# Altium PCB ECE453.PcbDoc
Units mil, origin at the board's own origin, x right, y up, seen from the top; angles counter-clockwise.
Board outline 3937.01 x 3937.01 mil, 2 copper layers (Top Layer, Bottom Layer); 50 components, 19 nets, 102 pads, 57 vias.
Unrouted connection lines stored in the file: 41.
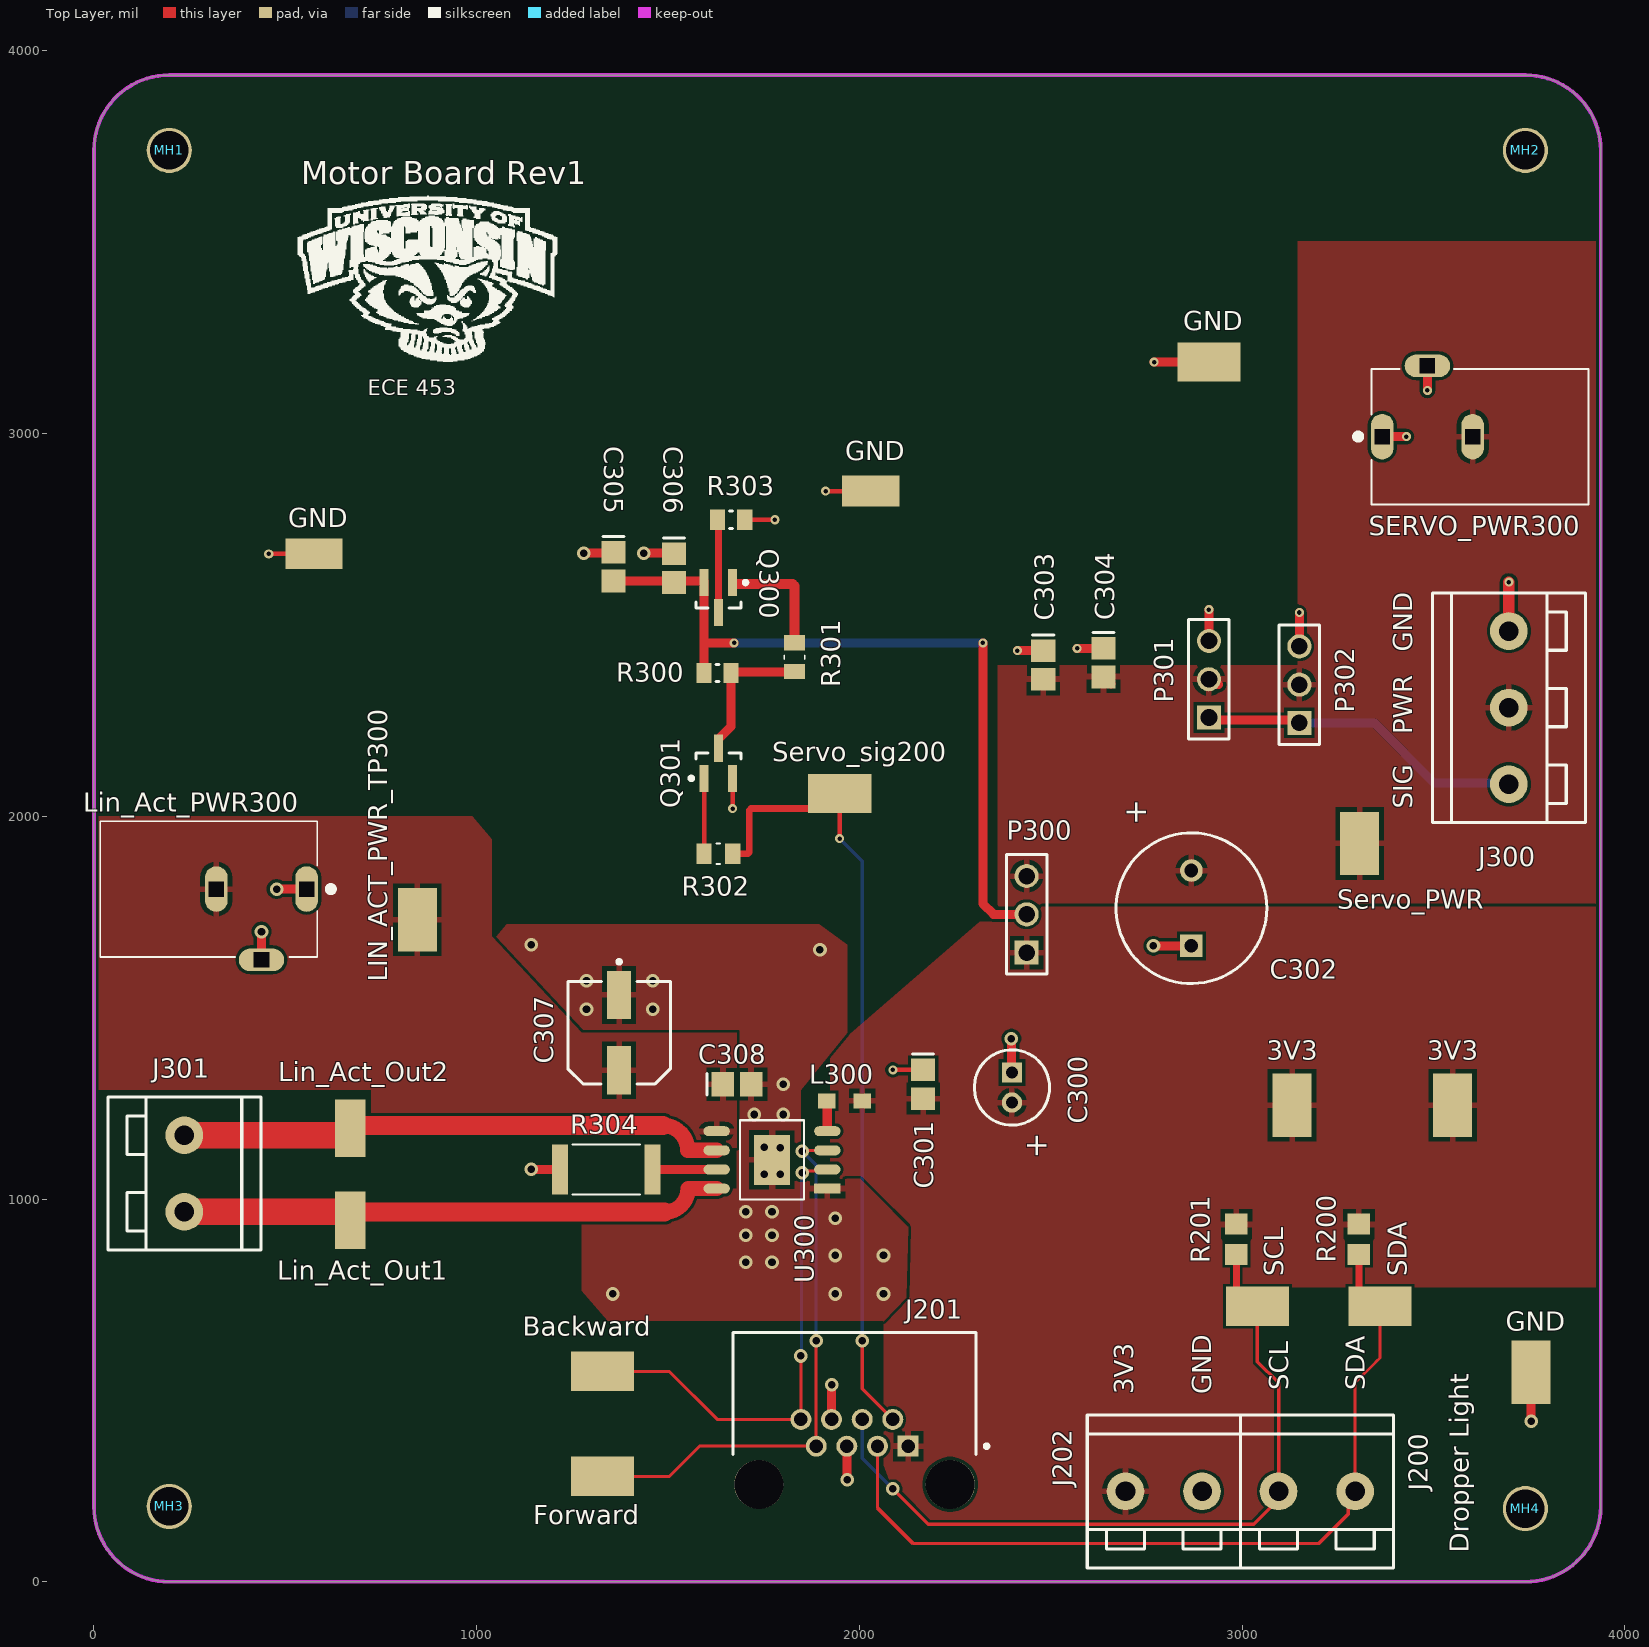
[diagram p0: Top Layer view]
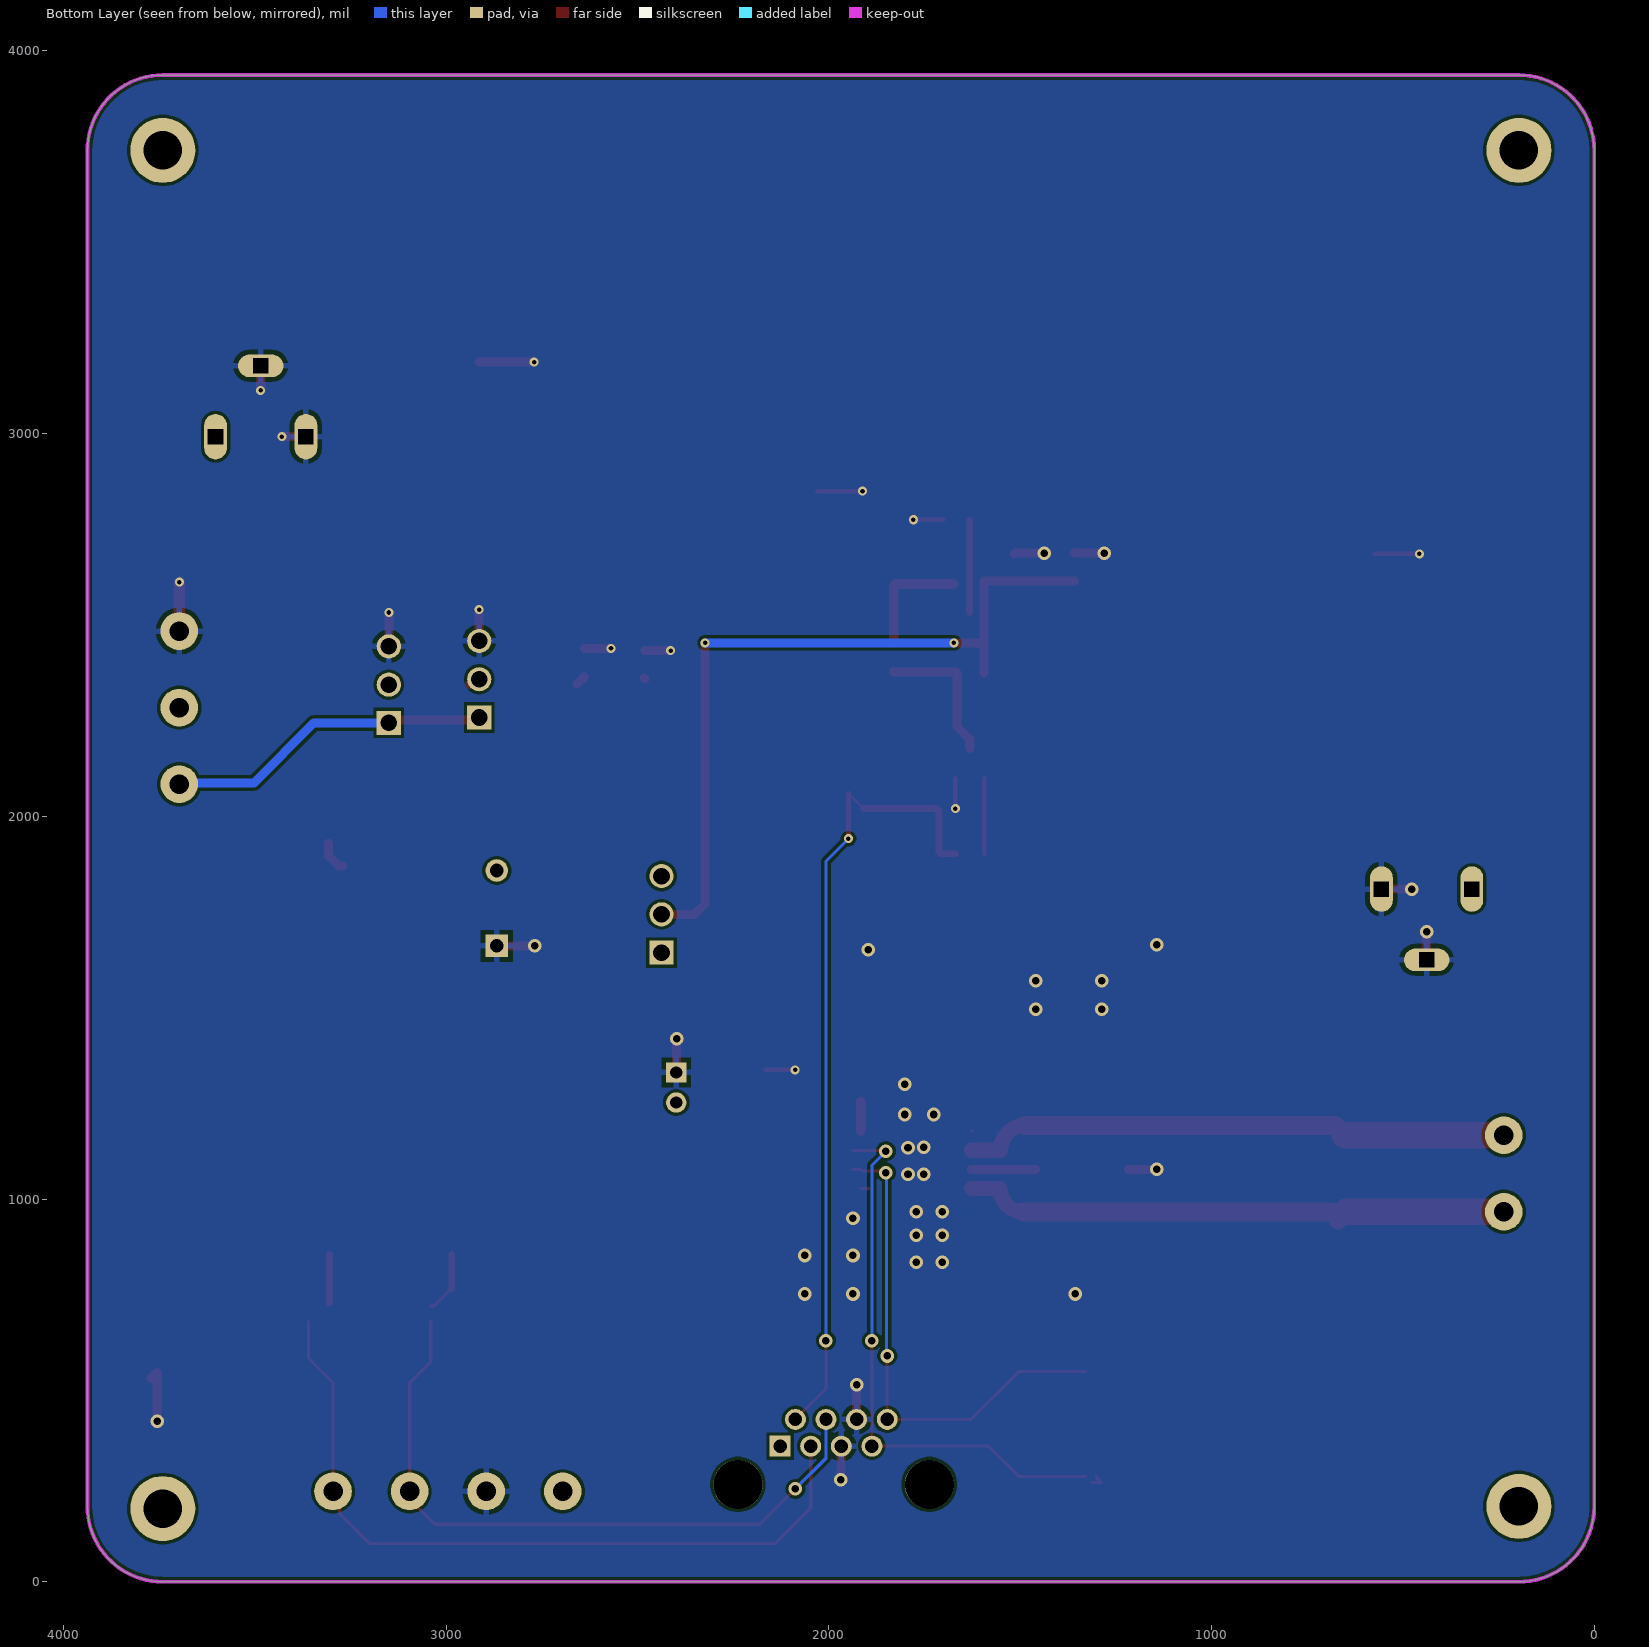
[diagram p1: Bottom Layer view, seen from below]

## Layer stack, top to bottom
Top Solder: solder mask 0.4, Solder Resist, Dk 3.5
Top Layer: signal copper 1.4
Dielectric1: dielectric 12.6, FR-4, Dk 4.8
Bottom Layer: signal copper 1.4
Bottom Solder: solder mask 0.4, Solder Resist, Dk 3.5

## Board outline
0,196.85 ccw(c196.85,196.85) 196.85,0 3740.16,0 ccw(c3740.16,196.85) 3937.01,196.85 3937.01,3740.16 ccw(c3740.16,3740.16) 3740.16,3937.01 196.85,3937.01 ccw(c196.85,3740.16) 0,3740.16

## Design rules (kind name [scope] priority, off if disabled: settings)
Clearance Polygon_Clearance [All vs InPolygon] p1: gap=7.87 ignorepadtopadclearanceinfootprint=FALSE
Clearance [All] p2: gap=7.87 ignorepadtopadclearanceinfootprint=TRUE
ComponentClearance [InComponent('U3')] p1: gap=0 collisioncheckmode=3 verticalgap=10 showdistances=FALSE
Height [All] p1: minheight=0 maxheight=2952.76 prefheight=500
HoleSize [All] p1: absolutevalues=TRUE maxlimit=250 minlimit=11.81 maxpercent=80.000 minpercent=20.000
MinimumAnnularRing [All] p1: minimumring=5.91
MinimumSolderMaskSliver [All] p1: minsoldermaskwidth=8.66
NetAntennae NetAntennae_5.0V [InNet('5.0V')] p1: netantennaetolerance=0
NetAntennae NetAntennae_3.3V [InNet('3.3V')] p2: netantennaetolerance=0
PlaneClearance [All] p1: clearance=11.81
PlaneConnect [All] p1: planeconnectstyle=Relief reliefexpansion=11.81 reliefentries=4 reliefconductorwidth=11.81 reliefairgap=11.81
PolygonConnect ViaConnect [All vs IsVia] p1: connectstyle=Direct reliefconductorwidth=15 reliefentries=4 polygonreliefangle="90 Angle" airgapwidth=10
PolygonConnect [All] p2: connectstyle=Relief reliefconductorwidth=15.75 reliefentries=4 polygonreliefangle="90 Angle" airgapwidth=11.81
RoutingVias [All] p1: holewidth=11.81 width=23.62 viastyle="Through Hole" minholewidth=11.81 minwidth=23.62 maxholewidth=196.85 maxwidth=393.7
SilkToSilkClearance [All] p1: silktosilkclearance=0
SilkToSolderMaskClearance [IsPad] p1: minsilkscreentomaskgap=0 clearancetoexposedcopper=TRUE
SolderMaskExpansion [All] p1: expansion=4 istentingtop=FALSE
UnConnectedPin [All] p1:
Width [All] p1: maxlimit=393.7 minlimit=7.87 preferedwidth=23.62
21 further rules are at their usual default settings.

## Classes and differential pairs
component class 04_Mechanical: MH1 MH2 MH3 MH4 "Motor Board Rev1"

## Components (designator, comment, footprint, x,y, rotation, side; value= is the part's Value field where it differs from the comment)
3V3 "TP_1206" TP-SMC-1206 3550,1245 r90 top (schematic designator 200)
3V3 "TP_1206" TP-SMC-1206 3130.55,1245 r90 top (schematic designator 300)
Backward "TP_1206" TP-SMC-1206 1328.74,550 r0 top (schematic designator Backward_TP200)
C300 "220uF" CAPPR2-5x11 2398.59,1291.5 r270 top
C301 "1uF" CAPC2012M 2166.42,1300 r270 top
C302 "470uF" CAPPR5-10x12.5 2867.59,1760 r90 top
C303 "1uF" CAPC2012M 2480.31,2395.67 r270 top
C304 "0.1uF" CAPC2012M 2637.8,2401.57 r270 top
C305 "0.1uF" CAPC2012M 1357.99,2652.28 r270 top
C306 "1uF" CAPC2012M 1515.47,2648.35 r270 top
C307 "EEE-1EA101XP" FP-SD8-MFG 1372.05,1435 r270 top value=100uF
C308 "0.22uF" CAPC2012M 1680,1300 r0 top
Forward "TP_1206" TP-SMC-1206 1328.74,275.89 r0 top (schematic designator Forward_TP200)
GND "TP_1206" TP-SMC-1206 3755,547.39 r90 top (schematic designator "GND Light200")
GND "5019" KSTN-5019_V 2030,2850 r180 top (schematic designator SERVO_GND300)
GND "5019" KSTN-5019_V 574.85,2685.75 r0 top (schematic designator LIN_ACT_GND300)
GND "TP_1206" TP-SMC-1206 2913.39,3186.97 r0 top (schematic designator GND200)
J200 "I2C" PHOENIX2X0.2 3195.22,236.22 r0 top
J201 "RJHSE-5080" FP-RJHSE-5080-MFG 1987.24,349.33 r0 top
J202 "Dropper Light" PHOENIX2X0.2 2795.28,236.22 r0 top
J300 "Servo" PHOENIX3X0.2 3697,2284.06 r90 top
J301 "Lin Act Outputs" PHOENIX2X0.2 236.22,1066.73 r270 top
L300 "742792093" SMD-0805 1961.21,1256.69 r180 top value=3.9nH
Lin_Act_Out1 "5019" KSTN-5019_V 669.29,944.88 r90 top (schematic designator Out301)
Lin_Act_Out2 "5019" KSTN-5019_V 669.29,1184.84 r90 top (schematic designator Out300)
Lin_Act_PWR300 "" CUI_PJ-102AH 300,1810 r180 top
LIN_ACT_PWR_TP300 "TP_1206" TP-SMC-1206 845,1730 r270 top
MH1 "MHOLE_2_55MM" MHOLE_2_55MM 196.85,3740.16 r0 top locked
MH2 "MHOLE_2_55MM" MHOLE_2_55MM 3740.16,3740.16 r0 top locked
MH3 "MHOLE_2_55MM" MHOLE_2_55MM 196.85,196.85 r0 top locked
MH4 "MHOLE_2_55MM" MHOLE_2_55MM 3740.16,191.24 r0 top locked
"Motor Board Rev1" "Bucky" WalkingBucky 825,3120 r0 top
P300 "61300311121" 61300311121 2437,1744 r90 top
P301 "61300311121" 61300311121 2913.39,2358.27 r90 top
P302 "61300311121" 61300311121 3149.61,2344.09 r90 top
Q300 "2N3906" SOT23-3M 1631.61,2571.57 r270 top
Q301 "2N3904" SOT23-3M 1631.61,2138.5 r90 top
R200 "RES_0805_K_010.00" RES_0805 3305,895 r90 top
R201 "RES_0805_K_010.00" RES_0805 2985,895 r90 top
R300 "RC0805FR-0710KL" RESC2013X60X35NL10T20 1629.65,2374.72 r180 top value=10kR
R301 "RMCF0805FT1K00" RESC2012X65N 1830.43,2416.06 r90 top
R302 "RMCF0805FT1K00" RESC2012X65N 1631.61,1902.28 r180 top
R303 "RC0805FR-0710KL" RESC2013X60X35NL10T20 1665,2775 r180 top value=10kR
R304 "SR733ATTER165F" RESC6432X70N 1338.58,1077.36 r0 top
SCL "TP_1206" TP-SMC-1206 3040,720 r0 top (schematic designator SCL200)
SDA "TP_1206" TP-SMC-1206 3360,720 r180 top (schematic designator SDA200)
Servo_PWR "TP_1206" TP-SMC-1206 3307.09,1929.13 r90 top (schematic designator 301)
SERVO_PWR300 "PJ-102AH" CUI_PJ-102AH 3622.05,2992.13 r0 top
Servo_sig200 "TP_1206" TP-SMC-1206 1948.54,2059.76 r180 top
U300 "A4953ELJTR-T" SOIC-8_ALM 1771.65,1102.36 r180 top

## Footprints (in the part's own frame and the unit in brackets; to place one, negate y for a bottom-side part, rotate by r counter-clockwise, add the part's x,y. Pads: shape width x height; smd on the part's side, far side on the other; paste and mask are expansions set on the pad)
61300311121 [mm]
  rect 1.6x1.6 hole 1.1: 1(-2.54,0)
  round 1.6 hole 1.1: 2(0,0) 3(2.54,0)
  silkscreen extent -3.96,-1.35 3.96,1.35, body extent -3.81,-1.27 3.81,1.27, height 8.57
CAPC2012M [mm]
  rect 1.5x1.6 smd mask+0.051: 1(-0.95,0) 2(0.95,0)
  silkscreen extent -2,-0.7 -2,0.7, body extent -1.1,-0.72 1.1,0.72, height 1.1
CAPPR2-5x11 [mm]
  rect 1.35x1.35 hole 0.8: 1(-1,0)
  round 1.35 hole 0.8: 2(1,0)
  silkscreen extent -2.5,-2.5 2.5,2.5, body extent -2.76,-2.76 2.79,2.76, height 12.51
CAPPR5-10x12.5 [mm]
  rect 1.5x1.5 hole 0.9: 1(-2.5,0)
  round 1.5 hole 0.9: 2(2.5,0)
  silkscreen extent -5,-5 5,5
CUI_PJ-102AH [mm]
  oval 1.508x3.016 hole 1 square: 1(-6.5,0) 2(-0.5,0)
  oval 3.016x1.508 hole 1 square: 3(-3.5,4.7)
  silkscreen extent -8.3,-4.5 7.2,4.5
FP-RJHSE-5080-MFG [mm]
  rect 1.39x1.39 hole 0.89 paste-1000 mask+0: 1(3.556,0.127)
  round 1.39 hole 0.89 paste-1000 mask+0: 2(2.54,1.905) 3(1.524,0.127) 4(0.508,1.905) 5(-0.508,0.127) 6(-1.524,1.905) 7(-2.54,0.127) 8(-3.556,1.905)
  round 3.25 hole 3.25 unplated paste-1000 mask+0: ""(-6.35,-2.413) ""(6.35,-2.413)
  silkscreen extent -8.06,-0.41 8.89,7.68, body extent -8.16,-7.78 8.16,7.78, height 0.25
FP-SD8-MFG [mm]
  rect 3.2x1.6 smd paste+0 mask+0: 1(-2.5,0) 2(2.5,0)
  silkscreen extent -4.82,-3.4 3.4,3.4, body extent -4.35,-3.65 4.35,3.65, height 0.25
KSTN-5019_V [mm]
  rect 3.8x2.03 smd: 1(0,0)
  body extent -1.9,-1.01 1.9,1.02, height 2.29
MHOLE_2_55MM [mm]
  round 3 / inner round 4.572 / far side round 4.318 hole 2.55: 1(0,0)
PHOENIX2X0.2 [mm]
  round 2.5 hole 1.295: 1(-2.54,0) 2(2.54,0)
  silkscreen extent -5.08,-5.08 5.08,5.08, body extent -5.48,-5.59 5.48,5.71, height 18.05
PHOENIX3X0.2 [mm]
  round 2.5 hole 1.3: 1(-5.08,0) 2(0,0) 3(5.08,0)
  silkscreen extent -7.62,-5.08 7.62,5.08, body extent -7.99,-5.64 8.05,5.66, height 18.05
RES_0805 [mm]
  rect 1.4x1.5 smd: 1(-1,0) 2(1,0)
  body extent -1.07,-0.7 1.07,0.7, height 0.7
RESC2012X65N [mm]
  rect 1.01x1.38 smd: 1(-0.95,0) 2(0.95,0)
  silkscreen extent -0.12,-0.68 0.12,0.68
RESC2013X60X35NL10T20 [mm]
  rect 1x1.35 smd: 1(-0.9,0) 2(0.9,0)
  silkscreen extent -0.1,-0.58 0.1,0.58, body extent -1.05,-0.68 1.05,0.67, height 0.6
RESC6432X70N [mm]
  rect 1.06x3.32 smd: 1(-3.078,0) 2(3.078,0)
  silkscreen extent -2.23,-1.65 2.23,1.65
SMD-0805 [mm]
  rect 1.15x1 smd: 1(-1.175,0) 2(1.175,0)
  body extent -1,-0.6 1,0.6, height 0.89
SOIC-8_ALM [mil]
  rect 69x26 smd paste+0 mask+0: 1(-144.69,75)
  oval 69x26 smd paste+0 mask+0: 2(-144.69,25) 3(-144.69,-25) 4(-144.69,-75) 5(144.68,-75) 6(144.68,-25) 7(144.68,25) 8(144.68,75)
  rect 95x130 smd paste-64.5 mask+0: 9(0,0)
  silkscreen extent -84,-104 84,104, body extent -165,-99 165,99, height 69
SOT23-3M [mm]
  rect 1.8x0.6 smd mask+0.051: 1(-1,0.95) 2(-1,-0.95) 3(1,0)
  silkscreen extent -1.12,-1.5 0.7,1.93, body extent -0.7,-1.5 0.7,1.5, height 1.1
TP-SMC-1206 [mm]
  rect 4.2x2.6 smd mask+0: 1(0,0)
  body extent -1.57,-0.79 1.63,0.81, height 1.22
WalkingBucky [mil]
  silkscreen extent -292,69 386,501

## Part data
3V3 3V3 Backward Forward GND GND LIN_ACT_PWR_TP300 SCL SDA Servo_PWR Servo_sig200: "Test Point SMD 1206", Case Size=1206, Manufacturer="TE Connectivity (Tyco Electronics)", Manufacturer Part Number=1625854-1, Operating Temperature="-55 to 125 C", Power Rating=N/R, Resistance Value="0 Ohm", Supplier Part Number=A106143CT-ND, ComponentLink1Description=https://datasheet.ciiva.com/6439/eng-ds-1773266-a-6439169.pdf, ComponentLink1URL=https://datasheet.ciiva.com/6439/eng-ds-1773266-a-6439169.pdf, ComponentLink2Description=https://datasheet.ciiva.com/30136/1773266-a-30136341.pdf, ComponentLink2URL=https://datasheet.ciiva.com/30136/1773266-a-30136341.pdf, ComponentLink3Description=https://datasheet.ciiva.com/6439/eng-ds-1773266-a-6439080.pdf, ComponentLink3URL=https://datasheet.ciiva.com/6439/eng-ds-1773266-a-6439080.pdf, ComponentLink4Description=https://datasheet.ciiva.com/6439/eng-ds-1773266-a-6439081.pdf, ComponentLink4URL=https://datasheet.ciiva.com/6439/eng-ds-1773266-a-6439081.pdf, ComponentLink5Description=https://datasheet.ciiva.com/6439/eng-ds-1773266-a-6439083.pdf, ComponentLink5URL=https://datasheet.ciiva.com/6439/eng-ds-1773266-a-6439083.pdf, Dimension="3.2 x 1.6 x 1.25mm", Family=RC, Mounting="Surface Mount", Packaging="Tape and Reel", Part No=1625854-1, Pricing 1="1=0.28, 10=0.261, 25=0.224, 50=0.1902, 100=0.1828, 250=0.1641, 500=0.1567, 1000=0.1306 (USD)", RoHS=Yes, Stock 1=31937, Supplier=Digi-Key, Temperature Coefficient=N/R, Terminal Pitch=N/R, Termination Style=N/R, Tolerance=N/R
C300: library part "Cap Pol1", "Capacitor Al 105deg 220uF 10V 5X11", Case/Package=Radial, Leakage Current=3uA, Manufacturer=Rubycon, Manufacturer Part Number=10YXJ220M5X11, Max Operating Temperature=105°C, Min Operating Temperature=-40°C, Package Quantity=3000, Ripple Current=250mA, Supplier Part Number=1189-4150-ND, Tolerance=20%, Voltage=10V, Capacitance=220uF, Category="Aluminum Electrolytic Capacitors", ComponentLink1Description=https://datasheet.ciiva.com/11777/0900766b810307a1-11777018.pdf?src-supplier=RSComponents, ComponentLink1URL=https://datasheet.ciiva.com/11777/0900766b810307a1-11777018.pdf?src-supplier=RSComponents, ComponentLink2Description=https://datasheet.ciiva.com/6318/e-yxj-6318863.pdf?src-supplier=Digi-Key, ComponentLink2URL=https://datasheet.ciiva.com/6318/e-yxj-6318863.pdf?src-supplier=Digi-Key, ComponentLink3Description=https://datasheet.ciiva.com/11690/e-yxj-11690699.pdf?src-supplier=Avnet, ComponentLink3URL=https://datasheet.ciiva.com/11690/e-yxj-11690699.pdf?src-supplier=Avnet, Construction=RADIAL, Diameter=5mm, Height=11mm, Height - Seated (Max)=0.492inch, Impedance=400mR, Lead Diameter=0.5mm, Lead Pitch=2mm, Life (Hours)=4000Hour, Mount="Through Hole", Packaging=Bulk, Pricing 1="1=0.26000, 10=0.17500, 50=0.11680, 100=0.09930, 500=0.07010, 1000=0.06134, 2500=0.05842, 5000=0.05404 (USD)", Radiation Hardening=No, RoHS=Yes, RoHS Compliant=Yes, Series=YXJ, Stock 1=94, Supplier=Digi-Key, Termination=Radial, Voltage Rating=10V
C301 C306: library part Cap_5, "CAP CER 1UF 50V X7R 0805", Case Code (Imperial)=0805, Case Code (Metric)=2012, Dielectric=X7R, Dielectric Material=Ceramic, Manufacturer=Samsung, Manufacturer Part Number=CL21B105KBFNNNE, Max Operating Temperature=125°C, Min Operating Temperature=-55°C, Package Quantity=1, Supplier Part Number=1276-1029-6-ND, Tolerance=10%, Voltage=50V, Capacitance=1uF, Case/Package=0805, Construction=Flat, Depth=1.25mm, Height=1.25mm, Length=2mm, Mount="Surface Mount", Number of Pins=2, Packaging="Tape and Reel", Radiation Hardening=No, REACH SVHC="No SVHC", RoHS Compliant=Yes, Series=CL, Supplier=Digi-Key, Termination=SMD/SMT, Thickness=0.053inch, Voltage Rating=50V, Voltage Rating (DC)=50V, Width=0.049inch
C302: library part "Cap Pol3", "CAP ALUM 470UF 20% 35V RADIAL", Case/Package=Radial, Dielectric Material=Aluminium, Leakage Current=3uA, Manufacturer=Rubycon, Manufacturer Part Number=35ZL470MEFC10X20, Max Operating Temperature=105°C, Min Operating Temperature=-40°C, Package Quantity=1000, Ripple Current=1.82A, Supplier Part Number=35ZL470MEFC10X20-ND, Tolerance=20%, Voltage=35V, Capacitance=470uF, Diameter=10mm, Height=20mm, Height - Seated (Max)=0.866inch, Impedance=23mR, Lead Diameter=0.6mm, Lead Free="Lead Free", Lead Pitch=5mm, Life (Hours)=4000Hour, Mount="Through Hole", Packaging=Bulk, Radiation Hardening=No, REACH SVHC=Unknown, Supplier=Digi-Key, Termination=Radial, Voltage Rating=35V
C303: library part Cap, "CAP CER 1UF 50V X7R 0805", Case Code (Imperial)=0805, Case Code (Metric)=2012, Dielectric=X7R, Dielectric Material=Ceramic, Manufacturer=Samsung, Manufacturer Part Number=CL21B105KBFNNNE, Max Operating Temperature=125°C, Min Operating Temperature=-55°C, Package Quantity=1, Supplier Part Number=1276-1029-6-ND, Tolerance=10%, Voltage=50V, Capacitance=1uF, Case/Package=0805, Construction=Flat, Depth=1.25mm, Height=1.25mm, Length=2mm, Mount="Surface Mount", Number of Pins=2, Packaging="Tape and Reel", Radiation Hardening=No, REACH SVHC="No SVHC", RoHS Compliant=Yes, Series=CL, Supplier=Digi-Key, Termination=SMD/SMT, Thickness=0.053inch, Voltage Rating=50V, Voltage Rating (DC)=50V, Width=0.049inch
C304 C305: library part Cap_1, "Cap Ceramic 0.1uF 50V X7R 20% SMD 0805 125°C Plastic T/R", Case/Package=0805, Dielectric=X7R, Dielectric Material=Ceramic, Manufacturer=KEMET, Manufacturer Part Number=C0805C104M5RAC7210, Max Operating Temperature=125°C, Min Operating Temperature=-55°C, Supplier Part Number=399-C0805C104M5RAC7210CT-ND, Tolerance=20%, Voltage Rating (DC)=50V, Category="Ceramic Capacitors", ComponentLink1Description=https://datasheet.ciiva.com/26923/getdatasheetpartid-738954-26923963.pdf?src-supplier=Verical, ComponentLink1URL=https://datasheet.ciiva.com/26923/getdatasheetpartid-738954-26923963.pdf?src-supplier=Verical, Construction=Flat, Depth=1.25mm, Height=0.9mm, Length=2mm, Mounting Technology="Surface Mount", Packaging="Tape and Reel", Pricing 1="1=0.10000, 10=0.05900, 50=0.03220, 100=0.02620, 500=0.01874, 1000=0.01472, 2500=0.01338, 5000=0.01231 (USD)", Radiation Hardening=No, RoHS=Yes, RoHS Compliant=Yes, Stock 1=29705, Supplier=Digi-Key
C307: library part CMP-05427-000061-1, "CAP ALUM 100UF 20% 25V SMD", Capacitance=100uF, Case/Package=Radial, Leakage Current=3uA, Manufacturer=Panasonic, Max Operating Temperature=85°C, Min Operating Temperature=-40°C, Package Quantity=900, Ratings=AEC-Q200, Ripple Current=143mA, Supplier Part Number=47AC4798, Tolerance=20%, Voltage=25V, Category="Aluminum Electrolytic Capacitors", ComponentLink1Description=https://media.digikey.com/pdf/Data%20Sheets/Panasonic%20Electronic%20Components/S_Series,Type_V_Rev2018.pdf?src-supplier=Digi-Key, ComponentLink1URL=https://media.digikey.com/pdf/Data%20Sheets/Panasonic%20Electronic%20Components/S_Series,Type_V_Rev2018.pdf?src-supplier=Digi-Key, ComponentLink2Description=https://industrial.panasonic.com/cdbs/www-data/pdf/RDE0000/DME0000COL90.pdf?src-supplier=Digi-Key, ComponentLink2URL=https://industrial.panasonic.com/cdbs/www-data/pdf/RDE0000/DME0000COL90.pdf?src-supplier=Digi-Key, ComponentLink3Description=https://industrial.panasonic.com/cdbs/www-data/pdf/RDE0000/DME0000COL90.pdf?src-supplier=Arrow+Electronics, ComponentLink3URL=https://industrial.panasonic.com/cdbs/www-data/pdf/RDE0000/DME0000COL90.pdf?src-supplier=Arrow+Electronics, Construction=Cylindrical, Contact Plating=Tin, Diameter=6.3mm, Height=7.7mm, Height - Seated (Max)=0.303inch, Lead Free="Lead Free", Length=8mm, Life (Hours)=2000Hour, Manufacturer Part Number=EEE-1EA101XP, Mount="Surface Mount", Mounting Technology="Surface Mount,PCB", Packaging="Tape and Reel", Polarity=Polar, Pricing="1=0.166, 900=0.162, 1800=0.158 (USD)", Radiation Hardening=No, Reach SVHC Compliant=Unknown, Ripple Current (AC)=143mA, RoHS=Yes, RoHS Compliant=Yes, Series=S, Stock=12600, Supplier=Newark, Termination=SMD/SMT, Voltage Rating=25V, Voltage Rating (DC)=25V
C308: library part Cap_2, "Cap Ceramic 0.22uF 50V X7R 10% SMD 0805 125°C Plastic T/R", Manufacturer=KEMET, Manufacturer Part Number=C0805C224K5RACAUTO7210, Supplier Part Number 1=399-C0805C224K5RACAUTO7210CT-ND, Category="Ceramic Capacitors", Pricing 1="1=0.19000, 10=0.12800, 50=0.07680, 100=0.06490, 500=0.04438, 1000=0.03926, 2500=0.03755, 5000=0.03414 (USD)", RoHS=Yes, RoHS Compliant=Yes, Stock 1=24243, Supplier 1=Digi-Key
GND GND Lin_Act_Out1 Lin_Act_Out2: library part CMP-1672-00008-1, "Test Point, 1 Position SMD, RoHS, Tape and Reel", Manufacturer="Keystone Electronics", Package Quantity=1, Supplier Part Number=59Y8500, Body Material=Bronze, Category=Connectors, ComponentLink1Description=https://datasheet.ciiva.com/14848/m60-2p61-14848437.pdf?src-supplier=Digi-Key, ComponentLink1URL=https://datasheet.ciiva.com/14848/m60-2p61-14848437.pdf?src-supplier=Digi-Key, ComponentLink2Description=https://datasheet.ciiva.com/14848/m60-2p61-14848438.pdf?src-supplier=Digi-Key, ComponentLink2URL=https://datasheet.ciiva.com/14848/m60-2p61-14848438.pdf?src-supplier=Digi-Key, ComponentLink3Description=https://datasheet.ciiva.com/14848/m60-2p61-14848439.pdf?src-supplier=Digi-Key, ComponentLink3URL=https://datasheet.ciiva.com/14848/m60-2p61-14848439.pdf?src-supplier=Digi-Key, ComponentLink4Description=https://datasheet.ciiva.com/16318/m60-2p61-16318395.pdf?src-supplier=Future+Electronics, ComponentLink4URL=https://datasheet.ciiva.com/16318/m60-2p61-16318395.pdf?src-supplier=Future+Electronics, ComponentLink5Description=https://datasheet.ciiva.com/16885/70182998-16885945.pdf?src-supplier=Allied+Electronics, ComponentLink5URL=https://datasheet.ciiva.com/16885/70182998-16885945.pdf?src-supplier=Allied+Electronics, Contact Material=Bronze, Contact Plating=Silver, Height=0.09inch, Lead Free="Lead Free", Manufacturer Part Number=5019, Material=Bronze, Mounting Technology="Surface Mount,PCB", Packaging="Tape and Reel", Pins=1, Plating=Silver, Pricing="1=0.411, 10=0.389, 25=0.285, 50=0.279, 100=0.273, 250=0.246 (USD)", Reach SVHC Compliant=No, RoHS=Yes, RoHS Compliant=Yes, Series=5019, Stock=11269, Supplier=Newark, Termination=SMD/SMT
J200 J202 J301: library part 2-Pin_2, "2~24 Poles, Screw Type, Horizontal, 5.08 Pitch, 26~14 (AWG), Terminal Block Connector", Manufacturer="CUI Devices", Manufacturer Part Number=TB006-508-02BE, Supplier Part Number=102-6191-ND, Category="Terminal Blocks", ComponentLink1Description=https://datasheet.ciiva.com/709/eng-cd-640456-w1-709680.pdf?src-supplier=Digi-Key, ComponentLink1URL=https://datasheet.ciiva.com/709/eng-cd-640456-w1-709680.pdf?src-supplier=Digi-Key, ComponentLink2Description=https://datasheet.ciiva.com/3118/eng-ds-82056-mta-0608-3118497.pdf?src-supplier=Avnet, ComponentLink2URL=https://datasheet.ciiva.com/3118/eng-ds-82056-mta-0608-3118497.pdf?src-supplier=Avnet, ComponentLink3Description=https://datasheet.ciiva.com/16401/eng-ds-82056-mta-0608-16401289.pdf?src-supplier=Future+Electronics, ComponentLink3URL=https://datasheet.ciiva.com/16401/eng-ds-82056-mta-0608-16401289.pdf?src-supplier=Future+Electronics, ComponentLink4Description=https://datasheet.ciiva.com/25617/0900766b80027008-25617244.pdf?src-supplier=RSComponents, ComponentLink4URL=https://datasheet.ciiva.com/25617/0900766b80027008-25617244.pdf?src-supplier=RSComponents, ComponentLink5Description=https://datasheet.ciiva.com/14156/04384301-14156820.pdf?src-supplier=Distrelec, ComponentLink5URL=https://datasheet.ciiva.com/14156/04384301-14156820.pdf?src-supplier=Distrelec, ComponentLink6Description=https://datasheet.ciiva.com/11746/0900766b80eb7fdd-11746365.pdf?src-supplier=RSComponents, ComponentLink6URL=https://datasheet.ciiva.com/11746/0900766b80eb7fdd-11746365.pdf?src-supplier=RSComponents, ComponentLink7Description=https://datasheet.ciiva.com/7128/1866390-7128742.pdf?src-supplier=Newark, ComponentLink7URL=https://datasheet.ciiva.com/7128/1866390-7128742.pdf?src-supplier=Newark, ComponentLink8Description=https://datasheet.ciiva.com/16505/eng-ds-82056-mta-0608-16505419.pdf?src-supplier=Avnet+Asia, ComponentLink8URL=https://datasheet.ciiva.com/16505/eng-ds-82056-mta-0608-16505419.pdf?src-supplier=Avnet+Asia, Pricing 1="1=0.86, 10=0.472, 25=0.3524, 50=0.3142, 100=0.308, 250=0.27108, 500=0.24644, 1000=0.2218, 5000=0.16635 (USD)", RoHS=Yes, Stock 1=50889, Supplier=Digi-Key
J201: library part CMP-02366-000003-1, "CONN MOD JACK 8P8C R/A UNSHLD", Contact Resistance=20mR, Current Rating=1.5A, Manufacturer=Amphenol, Max Voltage Rating (AC)=125V, Package=CONN_MOD_JACK, Supplier Part Number=28T0105, Temperature="-55°C to +85°C", Temperature Range High=+85°C, Temperature Range Low=-55°C, Automotive=No, Category=Conn, ComponentLink1Description=https://datasheet.ciiva.com/7629/1682821-7629402.pdf?src-supplier=Element14, ComponentLink1URL=https://datasheet.ciiva.com/7629/1682821-7629402.pdf?src-supplier=Element14, ComponentLink2Description=Datasheet, ComponentLink2URL=https://cdn.amphenol-icc.com/media/wysiwyg/files/documentation/datasheet/inputoutput/io-modjack-rjhse.pdf, ComponentLink3Description=https://datasheet.ciiva.com/685/rjhse5080-685586.pdf?src-supplier=Digi-Key, ComponentLink3URL=https://datasheet.ciiva.com/685/rjhse5080-685586.pdf?src-supplier=Digi-Key, ComponentLink4Description=https://datasheet.ciiva.com/1432/1693748-1432448.pdf?src-supplier=Element14, ComponentLink4URL=https://datasheet.ciiva.com/1432/1693748-1432448.pdf?src-supplier=Element14, ComponentLink5Description=https://datasheet.ciiva.com/15171/getdatasheetpartid-643190-15171163.pdf?src-supplier=Verical, ComponentLink5URL=https://datasheet.ciiva.com/15171/getdatasheetpartid-643190-15171163.pdf?src-supplier=Verical, Conn Gender=Female, Conn Orientation="Right Angle", Connector Type=RJ45, Contact Material=Gold,Nickel, Contact Plating=Gold, Depth=14.99mm, Device Class L1=Connectors, Device Class L2="Modular / Ethernet Connectors", Device Class L3=unset, Digikey Description="CONN MOD JACK 8P8C R/A UNSHLD", Footprint Url=https://cdn.amphenol-icc.com/media/wysiwyg/files/drawing/rjhse5080.pdf?__cf_chl_jschl_tk__=e349db0bbbb6188a39347cd5e541b92fa02c9719-1587748343-0-AW7tChdeHzRPLX9gSWj7WrKaXQoY9BsmT9Ek0h-T62M9y3Rs9iypFcOtkzb-6sGYQEjFE-jcoNciDETCOZrh1rYyOesac5SvYLoLwHIsHvF4AKBlx-MXmfZUVk9OTTJLqyQq2qMm0PFRLJpNcK0nrKResqOniRSYixG2sPTmOPraH-ULJFBDL602CHqcI9KKBgTq90Jh1OL2Td4moJ99rFsJRJ1Tk_uoxGe8ublcP_ARu-uLpWcQrBcwOcHDTAwL29DAwVaqcH7ta8Ks7WMlHmVl_pILeEDwT0bE9vu5Pa5S3PtNRF1leuFkgi_FMbUxTDulc5xzbXSfng8srUIV1lWXny5nx1fZJEUa_w97yKjffzBMxiWLWVN-V7-uqAaPbyv_m-wRyw5O25OZNyJOeGU, Gender=Female, Height=0.535inch, Is Female=yes, Lead Free=Yes, Length=15.75mm, Manufacturer Part Number=RJHSE-5080, Max Current Rating=1.5A, Mounting Technology="Through Hole,Panel", Mouser Description="Modular Connectors / Ethernet Connectors R/A RJ45 NONSHIELDED 8 CONT NO LEDS", Number of Contacts=8, Number of Ports=1, Number of Positions=8, Number of Positions Loaded=8, Octopart=https://octopart.com/rjhse-5080-amphenol-45060, Orientation="Right Angle", Packaging=Rail/Tube, Pitch=1.02mm, Pricing="1=0.966, 10=0.854, 25=0.808, 50=0.777, 100=0.748, 250=0.688, 500=0.627, 1000=0.568 (USD)", Radiation Hardening=No, Reach SVHC Compliant=Unknown, RoHS=TRUE, RoHS Compliant=Yes, Stock=8640, Supplier=Newark, Termination=Solder, Voltage Rating=125V, Voltage Rating (DC)=125V
J300: library part 3-Pin_2, "2~24 Poles, Screw Type, Horizontal, 5.08 Pitch, 26~14 (AWG), Terminal Block Connector", Manufacturer="CUI Devices", Manufacturer Part Number=TB006-508-03BE, Supplier Part Number 1=102-6192-ND, Category="Terminal Blocks", Pricing 1="1=0.91, 10=0.567, 25=0.4856, 50=0.4364, 100=0.4272, 250=0.3636, 500=0.34542, 1000=0.30906, 5000=0.24179 (USD)", RoHS=Yes, Stock 1=41909, Supplier 1=Digi-Key
L300: library part CMP-0220-00169-1, "SMD EMI Suppression Ferrite Bead WE-CBF, Z = 2200 Ohm", Case Code (Imperial)=0805, Case Code (Metric)=2012, Case/Package=SMD/SMT, Current Rating=200mA, DC Resistance (DCR)=600mR, Manufacturer="Wurth Electronics", Max Operating Temperature=125°C, Min Operating Temperature=-55°C, Package Quantity=1, Supplier Part Number=24AC5609, Test Frequency=100MHz, Tolerance=25%, Category="Ferrite Beads and Chips", ComponentLink1Description="Manufacturer Link", ComponentLink1URL=http://www.we-online.com, ComponentLink2Description=Datasheet, ComponentLink2URL=http://www.we-online.de/katalog/media/pdf/742792093.pdf, ComponentLink3Description=https://datasheet.ciiva.com/1475/742792093-1475025.pdf?src-supplier=Farnell, ComponentLink3URL=https://datasheet.ciiva.com/1475/742792093-1475025.pdf?src-supplier=Farnell, ComponentLink4Description=https://datasheet.ciiva.com/1013/742792093-1013376.pdf?src-supplier=Digi-Key, ComponentLink4URL=https://datasheet.ciiva.com/1013/742792093-1013376.pdf?src-supplier=Digi-Key, ComponentLink5Description=https://datasheet.ciiva.com/4940/742792093-88569-4940476.pdf?src-supplier=Mouser, ComponentLink5URL=https://datasheet.ciiva.com/4940/742792093-88569-4940476.pdf?src-supplier=Mouser, ComponentLink6Description=https://datasheet.ciiva.com/11799/0900766b80bbd134-11799557.pdf?src-supplier=Rs, ComponentLink6URL=https://datasheet.ciiva.com/11799/0900766b80bbd134-11799557.pdf?src-supplier=Rs, ComponentLink7Description=https://datasheet.ciiva.com/14122/742792093-eng-tds-14122810.pdf?src-supplier=Distrelec, ComponentLink7URL=https://datasheet.ciiva.com/14122/742792093-eng-tds-14122810.pdf?src-supplier=Distrelec, Core Material=Ferrite, DatasheetVersion=Dec-2005, Depth=1.2mm, Height=0.9mm, Impedance="2200 Ohm", Lead Free="Lead Free", Length=2mm, Manufacturer Part Number=742792093, Max Current Rating=200mA, Max DC Current=200mA, Mounting Technology="Surface Mount", Number of Lines=1, PackageDescription="Chip Inductor, 2-Leads, Body 2.0 x 1.2 mm", PackageReference=SMD-0805, PackageVersion=2005, Packaging="Tape and Reel", Pricing="1=0.145, 4000=0.145 (USD)", Reach SVHC Compliant=Unknown, RoHS=Yes, RoHS Compliant=Yes, Series=WE-CBF, Shielding=Unshielded, Stock=32000, Supplier=Newark, Termination=SMD/SMT, Weight=0.000388oz, Width=1.2mm
Lin_Act_PWR300: library part PJ-102AH, "2.0 mm Center Pin, 5.0 A, Right Angle, Through Hole, Tapered Pins, Dc Power Jack Connector <a href=\"https://pricing.snapeda.com/parts/PJ-102AH/CUI%20Devices/view-part?ref=eda\">Check availability</a> <a href=\"https://pricing.snapeda.com/parts/PJ-102AH/CUI%20Devices/view-part?ref=eda\">Check availability</a>", Package=None, Availability=Unavailable, MF="{'manufacturer': u'CUI'}", MP=PJ-102AH, Price=None
MH1 MH2 MH3 MH4: "Mounting Holde", Manufacturer Part Number="UW MTHOLE"
"Motor Board Rev1": "Bucky Badger Image", Manufacturer Part Number="UW Bucky"
P300 P301 P302: library part CMP-1502-01062-1, "THT Vertical Pin Header WR-PHD, Pitch 2.54 mm, Single Row, 3 pins", Color=Black, Contact Resistance=20mOhm, Manufacturer="Wurth Elektronik", Manufacturer 1="Wurth Electronics", Operating Temperature=-40to105degC, Rated Current=3A, Supplier Part Number=20X0950, Supplier Part Number 1=732-5316-ND, Withstanding Voltage=500VAC, Working Voltage=250VAC, Category=Connectors, ComponentLink1Description=http://www.farnell.com/cad/1737268.pdf?src-supplier=Element14, ComponentLink1URL=http://www.farnell.com/cad/1737268.pdf?src-supplier=Element14, ComponentLink2Description=https://katalog.we-online.de/em/datasheet/6130xx11121.pdf?src-supplier=Digi-Key, ComponentLink2URL=https://katalog.we-online.de/em/datasheet/6130xx11121.pdf?src-supplier=Digi-Key, ComponentLink3Description=https://datasheet.octopart.com/61300311121-W%C3%BCrth-Elektronik-datasheet-21154836.pdf?src-supplier=Element14, ComponentLink3URL=https://datasheet.octopart.com/61300311121-W%C3%BCrth-Elektronik-datasheet-21154836.pdf?src-supplier=Element14, Contact Material=Copper, Contact Mating Length=0.236inch, Contact Plating=Gold, Contact Type="Male Pin", Datasheet URL=https://katalog.we-online.de/em/datasheet/6130xx11121.pdf, Gender=Male, Lead Free="Lead Free", Manufacturer Part Number=61300311121, Manufacturer Part Number 1=61300311121, Manufacturer URL=http://www.we-online.de, Mount="Through Hole", Mounting Technology=THT, Number of Contacts=3, Number of Positions=3, Number of Rows=1, Orientation=Vertical, Package Reference=61300311121, Packaging=Bag, Part Number=61300311121, Pin Number=3, Pitch=2.54mm, Pricing="1=0.133, 10=0.115, 25=0.096, 50=0.081, 100=0.072 (USD)", Pricing 1="1=0.13, 10=0.113, 25=0.094, 50=0.079, 100=0.071, 1000=0.066 (USD)", Publisher=WurthElektronik, Reach SVHC Compliant=Unknown, RoHS=Yes, RoHS Compliant=Yes, Row Number=Single, Series=WR-PHD, Stock=65141, Stock 1=225106, Supplier=Newark, Supplier 1=Digi-Key, Termination=Solder
Q300: "TRANS PNP 40V 0.2A SOT23", Current - Collector (Ic) (Max)=200mA, DC Current Gain (hFE) (Min) @ Ic, Vce="100 @ 10mA, 1V", Frequency - Transition=250MHz, Manufacturer="ON Semiconductor", Manufacturer Part Number=MMBT3906LT1G, Package / Case="TO-236-3, SC-59, SOT-23-3", Power - Max=300mW, Supplier Device Package="SOT-23-3 (TO-236)", Supplier Part Number=MMBT3906LT1GOSCT-ND, Voltage - Collector Emitter Breakdown (Max)=40V, Category="Discrete Semiconductor Products", Mounting Type="Surface Mount", Packaging="Cut Tape (CT)", RoHS="RoHS Compliant", Supplier=Digi-Key, Transistor Type=PNP, Vce Saturation (Max) @ Ib, Ic="400mV @ 5mA, 50mA"
Q301: "NPN General Purpose Amplifier", Current - Collector (Ic) (Max)=200mA, Current - Collector Cutoff (Max)="50nA (ICBO)", DC Current Gain (hFE) (Min) @ Ic, Vce="100 @ 10mA, 1V", Frequency - Transition=300MHz, Manufacturer="Diodes Incorporated", Manufacturer Part Number=MMBT3904-7-F, Package / Case="TO-236-3, SC-59, SOT-23-3", Power - Max=300mW, Supplier Device Package=SOT-23-3, Supplier Part Number=MMBT3904-FDICT-ND, Voltage - Collector Emitter Breakdown (Max)=40V, Category="Discrete Semiconductor Products", Mounting Type="Surface Mount", Packaging="Cut Tape (CT)", RoHS="RoHS Compliant", Supplier=Digi-Key, Transistor Type=NPN, Vce Saturation (Max) @ Ib, Ic="300mV @ 5mA, 50mA"
R200 R201: "RES SMD 10K OHM 1% 1/8W 0805", Case Code (Imperial)=0805, Case Code (Metric)=2012, Manufacturer 1=Yageo, Manufacturer Part Number 1=RC0805FR-0710KL, Max Operating Temperature=155°C, Max Power Dissipation=125mW, Min Operating Temperature=-55°C, Package Quantity=1, Resistance=10kR, Resistance Tolerance=1%, Resistor Type="Thick Film", Supplier Part Number 1=311-10.0KCRCT-ND, Temperature Coefficient=100ppm/°C, Voltage Rating=150V, Case/Package=0805, Category="Chip SMD Resistors", ComponentLink1Description=https://datasheet.ciiva.com/11808/0900766b8106beab-11808151.pdf?src-supplier=RSComponents, ComponentLink1URL=https://datasheet.ciiva.com/11808/0900766b8106beab-11808151.pdf?src-supplier=RSComponents, ComponentLink2Description=https://datasheet.ciiva.com/12669/rc0805-12669688.pdf?src-supplier=Mouser, ComponentLink2URL=https://datasheet.ciiva.com/12669/rc0805-12669688.pdf?src-supplier=Mouser, ComponentLink3Description=https://datasheet.ciiva.com/46447/444164-46447563.pdf?src-supplier=Element14, ComponentLink3URL=https://datasheet.ciiva.com/46447/444164-46447563.pdf?src-supplier=Element14, ComponentLink4Description=https://datasheet.ciiva.com/2456/pyu-r-int-thick-7-2456972.pdf?src-supplier=Digi-Key, ComponentLink4URL=https://datasheet.ciiva.com/2456/pyu-r-int-thick-7-2456972.pdf?src-supplier=Digi-Key, ComponentLink5Description=https://datasheet.ciiva.com/2456/pyu-r-int-thick-7-2456973.pdf?src-supplier=Digi-Key, ComponentLink5URL=https://datasheet.ciiva.com/2456/pyu-r-int-thick-7-2456973.pdf?src-supplier=Digi-Key, ComponentLink6Description=https://datasheet.ciiva.com/2456/pyu-r-int-thick-7-2456974.pdf?src-supplier=Digi-Key, ComponentLink6URL=https://datasheet.ciiva.com/2456/pyu-r-int-thick-7-2456974.pdf?src-supplier=Digi-Key, ComponentLink7Description=https://datasheet.ciiva.com/16747/rc0805-16747087.pdf?src-supplier=Future+Electronics, ComponentLink7URL=https://datasheet.ciiva.com/16747/rc0805-16747087.pdf?src-supplier=Future+Electronics, Construction=Rectangular, Depth=1.25mm, Features="Moisture Resistant", Height=0.024inch, Lead Free="Lead Free", Length=2mm, Military Standard=Not, Number of Terminations=2, Packaging="Tape and Reel", Power Rating=125mW, Pricing 1="1=0.10000, 10=0.04200, 100=0.01690, 1000=0.00759, 2500=0.00659 (USD)", REACH SVHC=Unknown, RoHS=Yes, RoHS Compliant=Yes, Series=RC, Size Code=0805, Stock 1=7562122, Supplier 1=Digi-Key, Technology="THICK FILM", Termination=SMD/SMT, Tolerance=1%, Width=0.049inch
R300 R303: library part CMP-1659-00013-4, "Chip Resistor, 10 KOhm, +/- 1%, 0.125 W, -55 to 155 degC, 0805 (2012 Metric), RoHS, Tape and Reel", Case Code (Imperial)=0805, Case Code (Metric)=2012, Manufacturer=Yageo, Max Operating Temperature="155 degC", Max Power Dissipation=125mW, Min Operating Temperature="-55 degC", Package Quantity=5000, Resistance=10kR, Resistance Tolerance=1%, Resistor Type="Thick Film", Supplier Part Number=05M4535, Supplier Part Number 1=311-10.0KCRCT-ND, Temperature Coefficient=100ppm/°C, Voltage Rating="150 V", Case/Package=0805, Category="Chip SMD Resistors", ComponentLink1Description="Manufacturer URL", ComponentLink1URL=http://www.yageo.com/, ComponentLink2Description=Datasheet, ComponentLink2URL=http://www.yageo.com/documents/recent/PYu-RC_Group_51_RoHS_L_04.pdf, ComponentLink3Description=https://datasheet.ciiva.com/11808/0900766b8106beab-11808151.pdf?src-supplier=RSComponents, ComponentLink3URL=https://datasheet.ciiva.com/11808/0900766b8106beab-11808151.pdf?src-supplier=RSComponents, ComponentLink4Description=https://datasheet.ciiva.com/46447/444164-46447563.pdf?src-supplier=Element14, ComponentLink4URL=https://datasheet.ciiva.com/46447/444164-46447563.pdf?src-supplier=Element14, ComponentLink5Description=https://datasheet.ciiva.com/2456/pyu-r-int-thick-7-2456973.pdf?src-supplier=Digi-Key, ComponentLink5URL=https://datasheet.ciiva.com/2456/pyu-r-int-thick-7-2456973.pdf?src-supplier=Digi-Key, ComponentLink6Description=https://datasheet.ciiva.com/2456/pyu-r-int-thick-7-2456974.pdf?src-supplier=Digi-Key, ComponentLink6URL=https://datasheet.ciiva.com/2456/pyu-r-int-thick-7-2456974.pdf?src-supplier=Digi-Key, ComponentLink7Description=https://datasheet.ciiva.com/2456/pyu-r-int-thick-7-2456972.pdf?src-supplier=Digi-Key, ComponentLink7URL=https://datasheet.ciiva.com/2456/pyu-r-int-thick-7-2456972.pdf?src-supplier=Digi-Key, ComponentLink8Description=https://datasheet.ciiva.com/12669/rc0805-12669688.pdf?src-supplier=Mouser, ComponentLink8URL=https://datasheet.ciiva.com/12669/rc0805-12669688.pdf?src-supplier=Mouser, ComponentLink9Description=https://datasheet.ciiva.com/16747/rc0805-16747087.pdf?src-supplier=Future+Electronics, ComponentLink9URL=https://datasheet.ciiva.com/16747/rc0805-16747087.pdf?src-supplier=Future+Electronics, ComponentLink10Description=https://datasheet.ciiva.com/11808/0900766b8106beab-11808151.pdf?src-supplier=Rs, ComponentLink10URL=https://datasheet.ciiva.com/11808/0900766b8106beab-11808151.pdf?src-supplier=Rs, Construction=Rectangular, DatasheetVersion="Rev. 4, 02/2016", Depth=1.25mm, Features="Moisture Resistant", Height="0.5 mm", Lead Free="Lead Free", Length="2 mm", Manufacturer 1=Yageo, Manufacturer Part Number=RC0805FR-0710KL, Manufacturer Part Number 1=RC0805FR-0710KL, Military Standard=Not, Mount="Surface Mount", Mounting Technology="Surface Mount", Number of Terminations=2, PackageDescription="2-Pin Surface Mounted Device, Body 2 x 1.25 mm", PackageReference=0805, Packaging="Tape and Reel", Pins=2, Power Rating=125mW, Pricing="1=0.102, 10=0.035, 25=0.028, 50=0.021, 100=0.014 (USD)", Pricing 1="1=0.10000, 10=0.03800, 100=0.01560, 1000=0.00702, 2500=0.00610 (USD)", REACH SVHC="No SVHC", Reach SVHC Compliant=Unknown, RoHS=Yes, RoHS Compliant=Yes, RoHSCompliant=true, Series=RC, Size Code=0805, Stock=346650, Stock 1=5682818, Supplier=Newark, Supplier 1=Digi-Key, Technology="THICK FILM", Termination=SMD/SMT, Tolerance=1%, Width=0.049inch
R301 R302: Package=None, Availability=Unavailable, MP=RMCF0805FT1K00, Price=None
R304: "2512 Lo-ohm Thick Film Current Sense Resistors 1watts 0.165ohms 1%", Package=None, Availability=Unavailable, MP=SR733ATTER165F, Price=None
SERVO_PWR300: "2.0 mm Center Pin, 5.0 A, Right Angle, Through Hole, Tapered Pins, Dc Power Jack Connector <a href=\"https://pricing.snapeda.com/parts/PJ-102AH/CUI%20Devices/view-part?ref=eda\">Check availability</a> <a href=\"https://pricing.snapeda.com/parts/PJ-102AH/CUI%20Devices/view-part?ref=eda\">Check availability</a>", Package=None, Availability=Unavailable, MF="{'manufacturer': u'CUI'}", MP=PJ-102AH, Price=None
U300: "No Description Available", Mfr_Name="Allegro Microsystems Inc.", Copyright="Copyright (C) 2023 Ultra Librarian. All rights reserved.", Manufacturer_Part_Number=A4953ELJTR-T, RefDes=RefDes, Type=DEV

## Via types
v1: diameter 35.43, hole 19.68, Top Layer to Bottom Layer, 41 vias
v2: diameter 23.62, hole 11.81, Top Layer to Bottom Layer, 16 vias

## Nets (pads, with @x,y where several pads share a name; then routed paths per layer and width w, separated by ;. In a path a pad name is that pad's centre, name@x,y a point inside that pad or via, vN(x,y) a via of type N, cw(c..) or ccw(c..) an arc to the next point about the centre after c; other vN are vias at no path point)
3.3V: 3V3.1 C300.2 C301.2 J201.1 J202.1 L300.1 P300.1 R200.2 R201.2
GND: C300.1 C301.1 C302.1 C303.1 C304.1 C305.1 C306.1 C307.1 C308.2 GND.1 J201.5 J201.6 J202.2 J300.3 Lin_Act_PWR300.1 Lin_Act_PWR300.3 P301.3 P302.3 Q301.2 R303.1 R304.1 SERVO_PWR300.1 SERVO_PWR300.3 U300.1 U300.9 | length 2095.6
  Top Layer w7.87: U300.1@1894.84,1027.36 U300.1 ; J300.3@3696.7,2484.36 J300.3 ; v2@3696.7,2611.7 v2(3697,2612)
  Top Layer w11.81: v2(456.74,2685.75) GND.1@574.85,2685.75 ; v2(1669.02,2020.39) Q301.2 ; R303.1 v2(1779.17,2775) ; v2(1911.89,2850) GND.1@2030,2850 ; v2(2087.68,1337.4) C301.1
  Top Layer w23.62: Lin_Act_PWR300.3 v1(437.8,1698.87) ; v1(477.29,1810) Lin_Act_PWR300.1 ; v1(1142.88,1077.36) R304.1 ; v1(1280,2687.72) C305.1@1354.8,2687.72 ; v1(1436.73,2687.72) 1513.5,2687.72 C306.1 ; J201.6 v1(1927.24,515) ; J201.5 1967.87,353.7 1967.87,267.23 v1(1968.5,266.6) ; C300.1@2397.83,1331.63 v1@2397.83,1418.37 ; v2(2413,2433.07) C303.1 ; v2(2569,2438.98) C304.1 ; v1(2768.41,1661.57) C302.1 ; v2(2770.14,3186.97) GND.1@2913.39,3186.97 ; P301.3 v2(2913.39,2540.13) ; P302.3 v2(3149.61,2532.61) ; SERVO_PWR300.1 v2(3429.11,2992.13) ; v1(3755,419.81) 3755,547.39 GND.1@3771,531.39
  Top Layer w24: v2(3484.25,3112.89) SERVO_PWR300.3
  Top Layer w30: J300.3@3696.7,2484.36 v2@3696.7,2611.7
  other v1: 1356,752 1936.77,752 2063,752 1703,835.2 1771.65,835.2 1936.77,852.6 2063,852.6 1703,905 1771.65,905 1936.77,950 1703,967.29 1771.65,967.29 1752,1065 1793,1065 1793,1134.65 1752,1135.51 1725.27,1221 1801,1221 1801,1300 2397.07,1419.13 1287,1496 1459.76,1496 1287,1571 1459.76,1571 1897,1652 1142.88,1664.23
I2C_SCL: J200.1 J201.4 R201.1 SCL.1 | length 1939.4
  Top Layer w9: v1(2087.24,242.76) 2180,150 3030,150 3095.22,215.22 J200.1 3095.22,519.78 3040,575 SCL.1@3040,680.38 ; SCL.1@2985,766.68 3031.68,720 SCL.1
  Top Layer w18: SCL.1@2985,766.68 R201.1
  Bottom Layer w9: J201.4 2007.24,322.76 v1(2087.24,242.76)
I2C_SDA: J200.2 J201.3 R200.1 SDA.1 | length 2135.5
  Top Layer w7.87: J200.2@3277.9,218.89 J200.2 3295.22,519.78 3350,574.55 3350,575 3360,585 SDA.1@3360,680.38 ; SDA.1@3305,728.02 SDA.1@3311.01,722.01
  Top Layer w9: J201.3 2047.24,192.76 2140,100 3200,100 3277.9,177.9 J200.2@3277.9,218.89
  Top Layer w18: SDA.1@3305,728.02 R200.1
"LIN ACT IN1": Forward.1 J201.7 U300.3 | length 1512.8
  Top Layer w7.87: Forward.1@1302.28,274.52 1287.15,259.39 Forward.1@1312.24,259.39 ; Forward.1 1330.11,274.52 1502.67,274.52 1582.48,354.33 J201.7 v1(1887.24,630) ; v1(1850.61,1125.16) 1851.71,1126.26 1915.24,1126.26 U300.3 U300.3@1937.84,1127.36
  Bottom Layer w7.87: v1(1850.61,1125.16) 1887.24,1088.53 v1(1887.24,630)
"LIN ACT IN2": Backward.1 J201.8 U300.2 | length 1307.4
  Top Layer w7.87: Backward.1 1502.67,550 1628.34,424.33 J201.8 v1(1847.24,590) ; v1(1850.61,1069.22) 1855.29,1073.89 1912.87,1073.89 U300.2 U300.2@1937.84,1077.36
  Bottom Layer w7.87: v1(1847.24,590) 1848.93,591.68 1848.93,1067.53 v1(1850.61,1069.22)
NetC302_2: C302.2 C303.2 C304.2 J300.2 P300.3 P301.2 P302.2 SERVO_PWR300.2 Servo_PWR.1 | length 163.5
  Top Layer w23.62: C303.2 C303.2@2483.27,2361.22 ; C304.2@2657.48,2346.46 C304.2@2642.72,2361.22 ; P301.2@2910.43,2361.22 P301.2 2924.04,2358.27 P301.2@2938.21,2344.09 ; P302.2 P302.2@3157.14,2351.63 ; Servo_PWR.1@3269.24,1870.46 3279.91,1870.46 3307.09,1897.64 Servo_PWR.1 ; C304.2@2642.72,2361.22 2640.75,2361.22 C304.2 2639.76,2364.17 C304.2@2642.72,2361.22
NetC305_2: C305.2 C306.2 P300.2 Q300.2 R300.2 | length 2012.2
  Top Layer w23.62: C305.2 1594.21,2614.88 Q300.2 1594.21,2453.46 ; R300.2 1594.21,2453.46 ; v2(1672.95,2453.46) 1594.21,2453.46 ; v2(2322.83,2453.46) 2322.83,1771.97 2350.8,1744 P300.2
  Bottom Layer w23.62: v2(1672.95,2453.46) v2(2322.83,2453.46)
NetL300_2: L300.2 U300.4 | length 79.9
  Top Layer w7.87: L300.2 L300.2@1916.34,1255.3
  Top Layer w25: U300.4 L300.2@1916.34,1255.3
NetQ300_1: Q300.1 R301.2 | length 313.9
  Top Layer w7.87: Q300.1 Q300.1@1672.95,2607.01
  Top Layer w25: Q300.1@1672.95,2607.01 1825.82,2607.01 1830.43,2602.4 R301.2
NetQ300_3: Q300.3 R303.2 | length 255.1
  Top Layer w7.87: R303.2 cw(c1629.57,2772.95) R303.2@1631.61,2772.95 ; Q300.3 Q300.3@1639.49,2540.08
  Top Layer w18: Q300.3 R303.2@1631.61,2772.95
NetQ301_1: Q301.1 R302.2 | length 202.4
  Top Layer w7.87: R302.2@1590.28,1898.35 R302.2
  Top Layer w11.81: R302.2 Q301.1
NetQ301_3: Q301.3 R300.1 R301.1 | length 377.7
  Top Layer w23.62: Q301.3 1631.61,2201.5 1665.08,2234.97 R300.1 1667.05,2376.69 1828.46,2376.69 R301.1
NetR304_2: R304.2 U300.7 | length 167.2
  Top Layer w23.62: R304.2 U300.7
OUT1: J301.1 Lin_Act_Out2.1 U300.6 | length 1438.5
  Top Layer w7.87: Lin_Act_Out2.1@651.18,1166.73 Lin_Act_Out2.1
  Top Layer w40: 1486.42,1192.41 cw(c1486.42,1127.36) 1551.47,1127.36 U300.6
  Top Layer w50: Lin_Act_Out2.1 676.86,1192.41 1486.42,1192.41
  Top Layer w70: J301.1 Lin_Act_Out2.1@651.18,1166.73
OUT2: J301.2 Lin_Act_Out1.1 U300.8 | length 1451.2
  Top Layer w23: Lin_Act_Out1.1@647.44,966.73 Lin_Act_Out1.1@662.44,951.73 ; Lin_Act_Out1.1 Lin_Act_Out1.1@669.29,958.58
  Top Layer w40: 1491.04,965.96 ccw(c1491.04,1027.36) 1552.43,1027.36 U300.8
  Top Layer w50: Lin_Act_Out1.1 669.29,951 684.25,965.96 1491.04,965.96
  Top Layer w70: J301.2 Lin_Act_Out1.1@647.44,966.73
Servo_sense: J300.1 P301.1 P302.1 | length 854
  Top Layer w23.62: P301.1 2920.47,2251.18 3142.52,2251.18 P302.1
  Bottom Layer w23.62: P302.1 3345.21,2244.09 3502.38,2086.93 J300.1@3696.4,2086.93
SERVO_Signal: J201.2 R302.1 Servo_sig200.1 | length 2107.1
  Top Layer w7.87: R302.1@1665.08,1898.35 R302.1 ; Servo_sig200.1@1909.17,2020.39 Servo_sig200.1 ; v1@2007.36,629.89 v1(2007.47,630) 2007.47,504.11 J201.2
  Top Layer w12: v2(1948.54,1941.65) Servo_sig200.1
  Top Layer w18: R302.1 1707.71,1902.28 1712.32,1906.9 1712.32,2015.78 1716.94,2020.39 Servo_sig200.1@1909.17,2020.39
  Bottom Layer w7.87: v2(1948.54,1941.65) 2007.47,1882.73 v1(2007.47,630)
VBB: C307.2 C308.1 Lin_Act_PWR300.2 LIN_ACT_PWR_TP300.1 U300.5 | length 0.4
  Top Layer w7.87: U300.5@1626.67,1177.66 U300.5
pads on no net: J201. MH1.1 MH2.1 MH3.1 MH4.1

## Polygon pours and split planes (outlines as drawn)
3.3V on Top Layer "3.3V_L01_P009" (solid, pour order 9): 1974.72,1430.28 1937.64,1404.13 1924.44,1380 1924.44,1053 2001.65,1053 2127.24,927.4 2123,743 2063,680.38 2063,305 2087.24,242.76 2180,150 3030,150 3095.22,215.22 3095.22,519.78 3040,575 3040,770 3935,770 3936,1771.97 2442.18,1771.97 2437.01,1725 2315,1725
GND on Top Layer "GND_L01_P008" (solid, pour order 8): 1047.11,1680.25 1078,1717.5 1894.84,1717.5 1968.5,1664.23 1968.5,1435 1847.24,1284.82 1847.24,1053 2001.65,1053 2045,1010 2127.24,927.4 2123,743 2063,680.38 1343,682 1275,761 1275,944.88 1328.74,987.04 1495.11,987.04 1535.43,1027.36 1680,1027.36 1680,1435 1275,1435
NetC302_2 on Top Layer "NETC302_2_L01_P001" (solid, pour order 1): 2386,1765.08 2582,1765.08 2655,1765.08 2715.63,1765.08 3941,1765.08 3941,1862.11 3942.01,3010.11 3941,3503.11 3145,3503.11 3145,2395 2361.3,2395 2361.3,2316.26 2361.3,2305.11 2361.3,2281.11 2361.3,2248.11 2361.3,2173.11 2361.3,2083.11 2361.3,2029.65 2361,1765.08
VBB on Top Layer "VBB_L01_P007" (solid, pour order 7): 1040,1686.48 1040,1940 988.19,2000 10,2000 10,1285 725,1285 725,1167.68 1495.11,1167.68 1535.43,1134.65 1680,1134.65 1680,1435 1275,1435
GND on Bottom Layer "GND_L02_P005" (solid, pour order 5): 0,3937.01 3937.01,3937.01 3937.01,0 0,0

## Keep-outs
Keep-Out Layer:
  the board outline again, w10

## Other copper
Bottom Layer:
  pour cut-out: 0,3800 30.11,3852.09 84.92,3906.9 126.49,3937.01 126.49,3970 -30,3970 -45,3780
  pour cut-out: 5,125 48.23,66.83 91.76,26.98 126.49,0 126.49,-30 -15,-25 -25,126.49
  pour cut-out: 3935,120 3906.9,84.92 3868.1,37.61 3812.3,5 3805,-15 3960,-10 3965,98.37
  pour cut-out: 3810,3930 3845.24,3910.03 3899.39,3868.1 3932.01,3812.3 3965,3815 3960,3985 3810,3990

## Silkscreen, mask and mechanical layers (free items; w line width, h text height)
Top Overlay:
  text "GND" at 3445,2430 h50 r90
  text "PWR" at 3445,2214.72 h50 r90
  text "SIG" at 3445,2020 h50 r90
  text "SCL" at 3120,500 h50 r90
  text "SDA" at 3320,500 h50 r90
  text "3V3" at 2715,490 h50 r90
  text "GND" at 2920,490 h50 r90
Mechanical 2:
  lines w10: 196.85,0 cw(c196.85,196.85) 0,196.85 0,3740.16 cw(c196.85,3740.16) 196.85,3937.01 3740.16,3937.01 cw(c3740.16,3740.16) 3937.01,3740.16 3937.01,196.85 cw(c3740.16,196.85) 3740.16,0 196.85,0 ; 196.85,0 196.85,0

## Text inside footprints (layer, text, board x,y; h text height)
C300: Top Overlay "+" at 2437.96,1173.39 h59.05 r270
C302: Top Overlay "+" at 2749.48,1976.54 h59.06 r90
"Motor Board Rev1": Top Overlay "ECE 453" at 715,3100 h40